# EAGLE board hv_lv_combo (EAGLE 7.2.0)
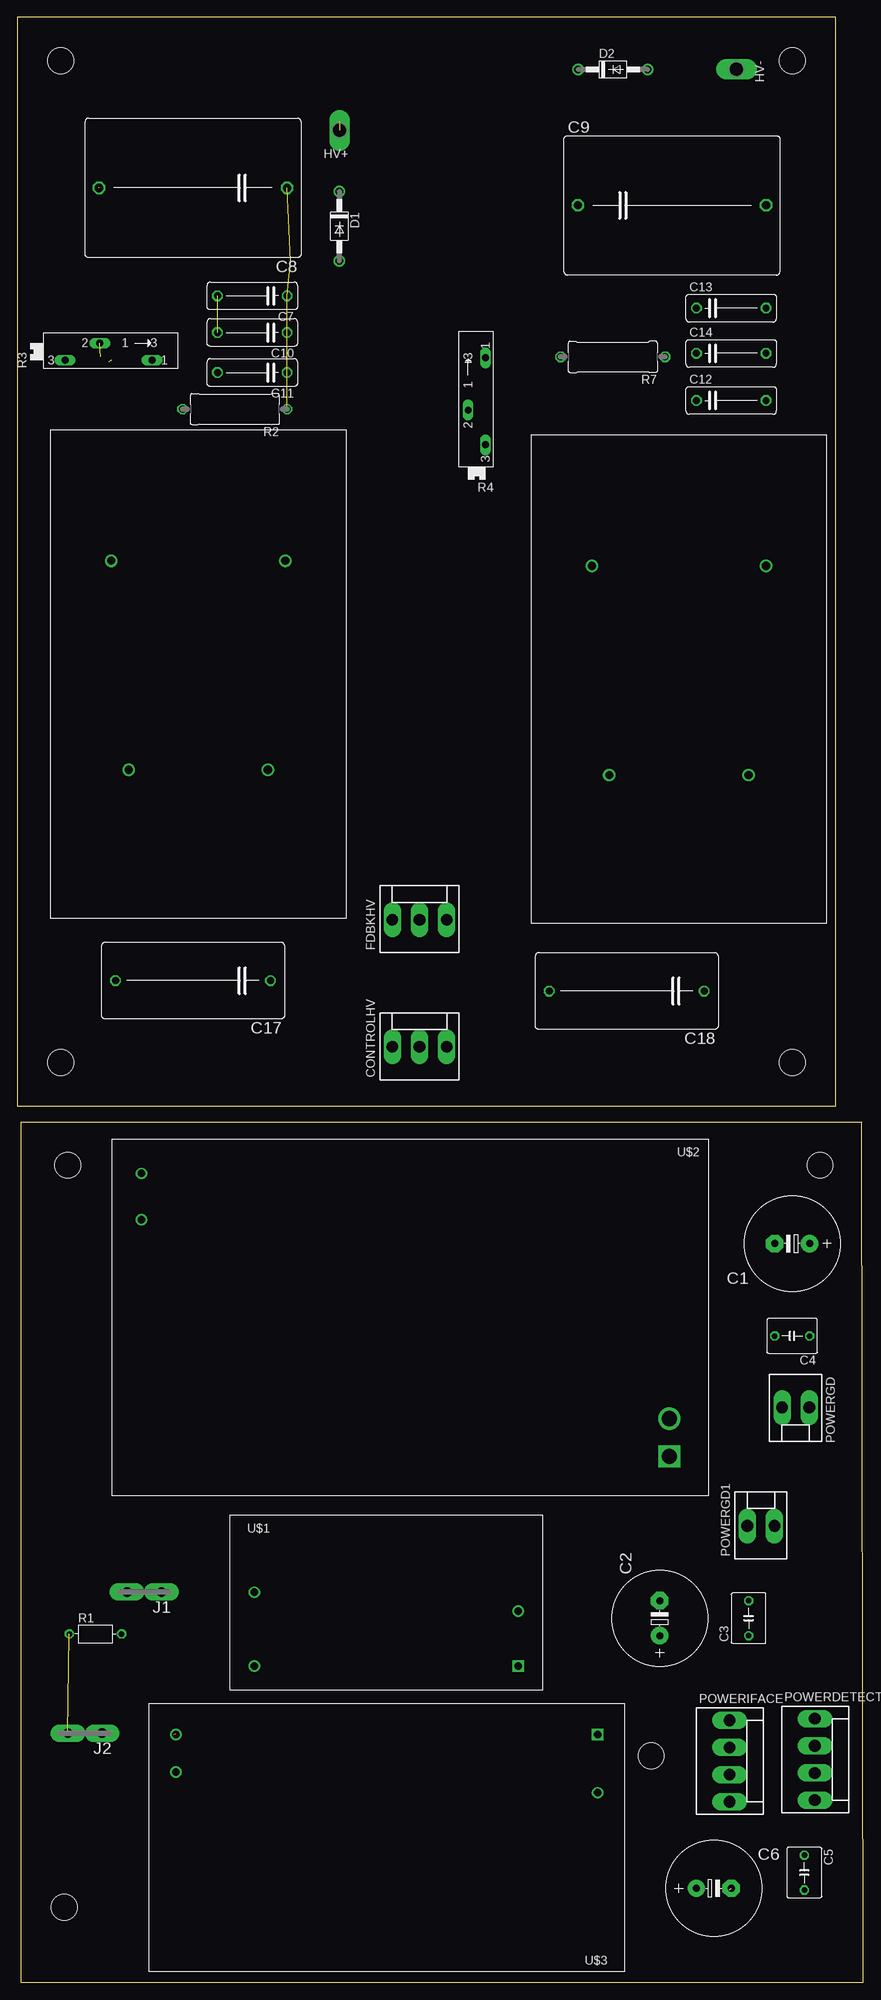
[diagram p0: board, top side]
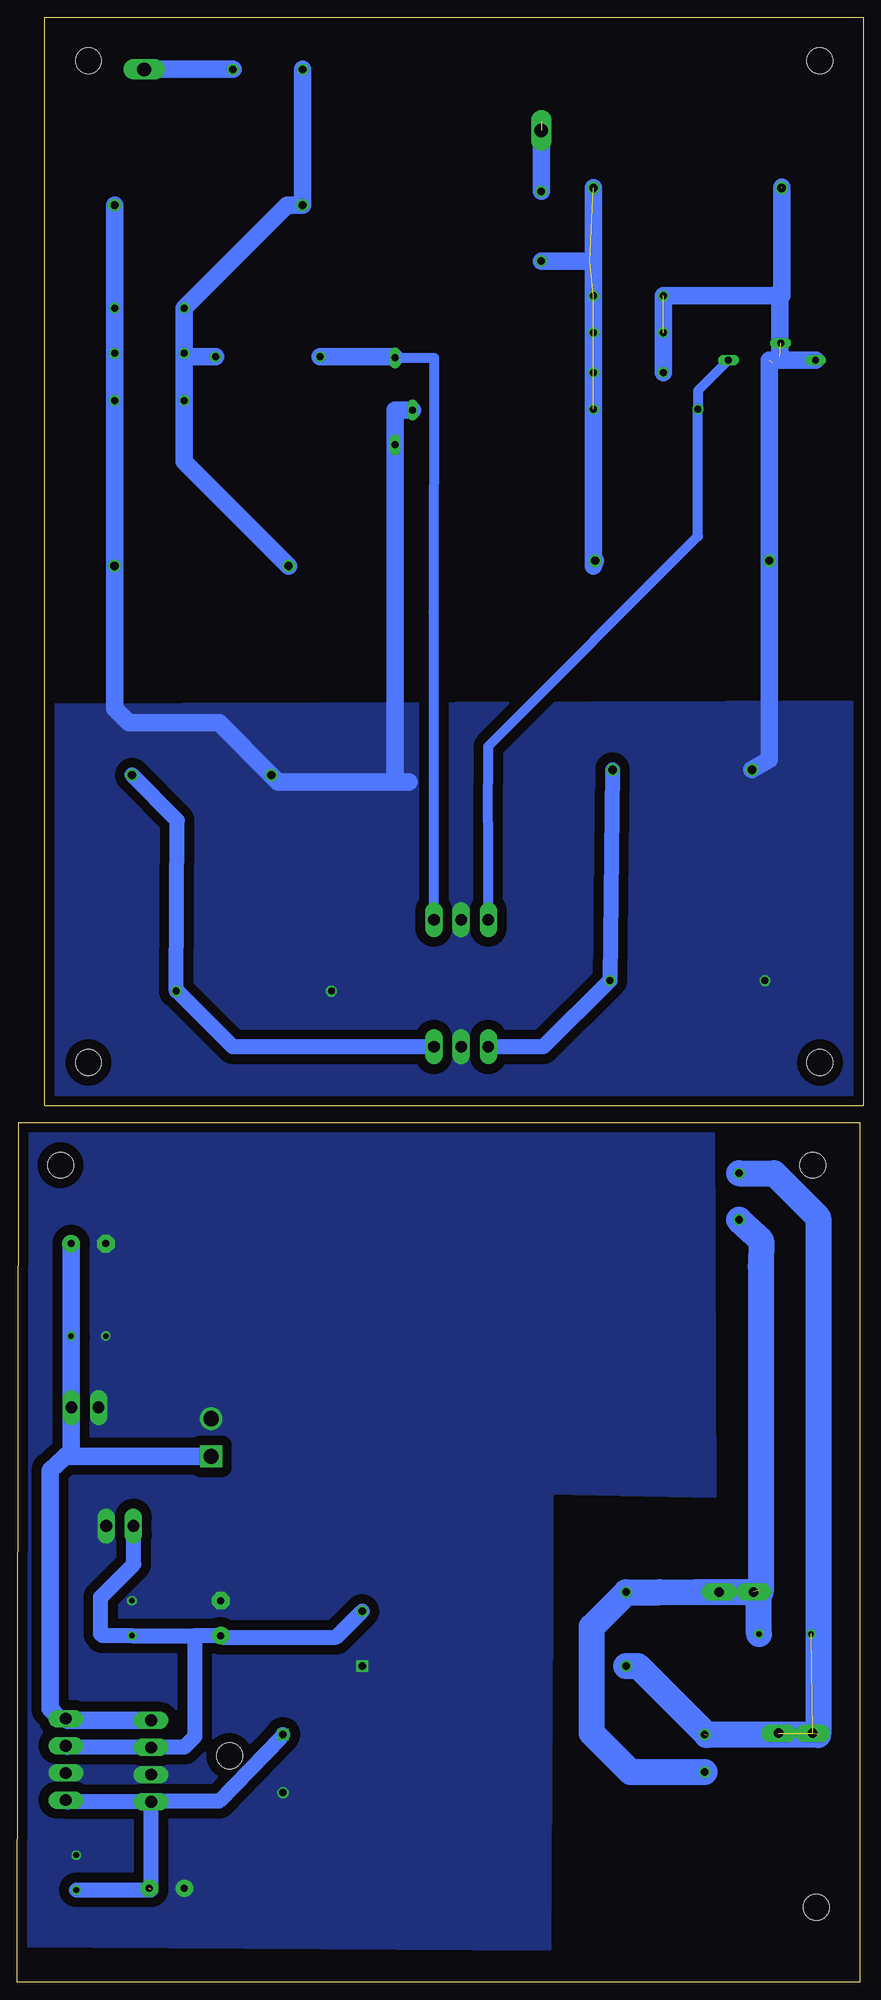
[diagram p1: board, bottom side, seen from below]

Size 123.42 x 286.51 mm. Coordinates in mm from the lower left corner, seen from the top.
Outline: 0.51,0 123.42,0 123.17,125.4 0.51,125.4 0.51,0
Outline: 119.38,127.76 119.38,286.51 0,286.51 0,127.76 119.38,127.76
Copper layers (1*16): Top 0.035mm / dielectric 1.5mm / Bottom 0.035mm
Design rules "default": minimum track width 10mil, minimum drill 24mil, track to track 8mil, track to pad 8mil, pad to pad 8mil, via to via 8mil, smd to smd 8mil, copper to edge 40mil, drill to drill 8mil, minimum pad ring 10mil, minimum via ring 8mil, stop-mask expansion 4mil, vias tented up to drill 0mil, thermal gap 10mil
Holes 3.8 mm at 117.09,119.13 92.46,33.02 7.37,119.13 6.86,10.92 113.03,280.16 6.35,280.16 113.03,134.11 6.35,134.11

## Footprints (pad centres in the part's own frame; a part is rotated, then mirrored left to right if it is on the bottom)
E5-13 = drill 1.016 pad 2.54: + -2.54,0 | drill 1.016 pad 2.54 octagon: - 2.54,0
C050-050X075 = drill 0.813 octagon: 1 -2.54,0; 2 2.54,0
C102-043X133 = drill 1.016 octagon: 1 -5.08,0; 2 5.08,0
C275-205X316 = drill 1.194 octagon: 1 -13.716,0; 2 13.716,0
C225-113X268 = drill 1.016 octagon: 1 -11.303,0; 2 11.303,0
KK-156-3 = drill 1.7 pad 2.184 long: 1 -3.96,0; 2 0,0; 3 3.96,0
DO41-10 = drill 1.118: A 5.08,0; C -5.08,0
P1-20Y = drill 2.007 pad 2.54 long: TP 0,0
F061.100 = drill 1.4 pad 2.54 long: A1 -2.5,0; A2 2.5,0
KK-156-4 = drill 1.7 pad 2.184 long: 1 -5.94,0; 2 -1.98,0; 3 1.98,0; 4 5.94,0
KK-156-2 = drill 1.7 pad 2.184 long: 1 -1.98,0; 2 1.98,0
R-7,5 = drill 0.813 octagon: 1 -3.81,0; 2 3.81,0
P0613/15 = drill 1.016 octagon: 1 -7.62,0; 2 7.62,0
SP19L = drill 1.016 long: A 5.715,-1.27; E -6.985,-1.27; S -1.905,1.27
IRM-05-05 = drill 1.1: +V 42.1,11.45; ACL 3.6,3.45; ACN 3.6,14.2 | drill 1.1 square: -V 42.1,3.45
IRM-60-12 = drill 2.2 square: P$1 5.7,46.25 | drill 2.2: P$2 5.7,40.75 | drill 1.1: P$3 82.7,5; P$4 82.7,11.75
IRM-30-15 = drill 1.1: +V 4,13; ACL 65.5,4.5; ACN 65.5,10 | drill 1.1 square: -V 4,4.5
EMCO-F = drill 1.2: P$1 0,0; P$2 0,20.32; P$3 30.48,-2.54; P$4 30.48,22.86

## Placement (x,y rotation side)
C1  [E5-13]  113.03,107.7 180 top
C2  [E5-13]  93.73,53.09 90 top
C3  [C050-050X075]  106.68,53.09 90 top
C4  [C050-050X075]  113.03,94.23 180 top
C5  [C050-050X075]  114.81,16 270 top
C6  [E5-13]  101.6,13.72 0 top
C7  .01u  [C102-043X133]  34.29,245.87 180 top
C8  1u  [C275-205X316]  25.65,261.62 180 top
C9  1u  [C275-205X316]  95.5,259.08 0 top
C10  1n  [C102-043X133]  34.29,240.54 180 top
C11  10p  [C102-043X133]  34.29,234.7 180 top
C12  .01u  [C102-043X133]  104.14,230.63 0 top
C13  1n  [C102-043X133]  104.14,244.09 0 top
C14  10p  [C102-043X133]  104.14,237.49 0 top
C17  .1u  [C225-113X268]  25.65,146.05 180 top
C18  .1u  [C225-113X268]  88.9,144.53 180 top
CONTROLHV  [KK-156-3]  58.67,136.4 0 top
D1  1N4004  [DO41-10]  46.99,256.03 270 top
D2  1N4004  [DO41-10]  86.87,278.89 0 top
FDBKHV  [KK-156-3]  58.67,154.94 0 top
HV+  TPPAD1-20Y  [P1-20Y]  46.99,270 180 top
HV-  TPPAD1-20Y  [P1-20Y]  104.9,278.89 270 top
J1  PIN2F061.100  [F061.100]  18.54,56.9 180 top
J2  PIN2F061.100  [F061.100]  9.91,36.32 180 top
POWERDETECT  [KK-156-4]  116.33,32.51 270 top
POWERGD  [KK-156-2]  113.54,83.82 180 top
POWERGD1  [KK-156-2]  108.46,66.55 0 top
POWERIFACE  [KK-156-4]  103.89,32.26 270 top
R1  VARISTOR-7,5  [R-7,5]  11.43,50.8 0 top
R2  2M  [P0613/15]  31.75,229.36 180 top
R3  [SP19L]  13.97,237.74 0 top
R4  [SP19L]  67.06,231.14 90 top
R7  2M  [P0613/15]  86.87,236.98 180 top
U$1  IRM-05-05  [IRM-05-05]  30.99,42.67 0 top
U$2  IRM-60-12  [IRM-60-12]  100.84,122.94 180 top
U$3  IRM-30-15  [IRM-30-15]  88.65,40.64 180 top
U$4  EMCO-F104PIN  [EMCO-F]  36.58,176.78 90 top
U$5  EMCO-F104PIN  [EMCO-F]  106.68,176.02 90 top

## Library data of the parts
C1-C14 C17 C18 = rcl
CONTROLHV FDBKHV POWERDETECT POWERGD POWERGD1 POWERIFACE = con-molex; OC_FARNELL: unknown; OC_NEWARK: unknown
D1 D2 = diode
HV+ HV- = testpad
J1 J2 = con-faston; OC_FARNELL: unknown; OC_NEWARK: unknown
R1 = varistor
R2 R7 = resistor
R3 R4 = pot
U$1-U$3 = meanwell
U$4 U$5 = dc-dc-converter

## Nets
+15V: C1.+ C4.1 POWERDETECT.1 POWERGD.1 POWERIFACE.1 U$2.P$1
-15V: C5.2 C6.- POWERDETECT.4 POWERIFACE.4 U$3.-V
GND: C1.- C2.- C3.2 C4.2 C5.1 C6.+ POWERDETECT.3 POWERGD1.2 POWERGD.2 POWERIFACE.3 U$1.-V U$2.P$2 U$3.+V
GND1: C7.2 C8.2 C9.2 C10.2 C11.2 C12.2 C13.2 C14.2 C17.2 C18.2 CONTROLHV.2 FDBKHV.2 R3.E R3.S R4.E R4.S U$4.P$2 U$4.P$4 U$5.P$2 U$5.P$3
N$1: J1.A1 J1.A2 R1.2 U$1.ACN U$2.P$4 U$3.ACN
N$2: J2.A1 J2.A2 R1.1 U$1.ACL U$2.P$3 U$3.ACL
N$4: C7.1 C8.1 C10.1 C11.1 D1.A R2.1 U$4.P$3
N$5: C9.1 C12.1 C13.1 C14.1 D2.C R7.1 U$5.P$4
N$6: FDBKHV.1 R2.2 R3.A
N$7: D1.C HV+.TP
N$8: FDBKHV.3 R4.A R7.2
N$9: D2.A HV-.TP
N$13: C17.1 CONTROLHV.1 U$4.P$1
N$15: C18.1 CONTROLHV.3 U$5.P$1
VCC: C2.+ C3.1 POWERDETECT.2 POWERGD1.1 POWERIFACE.2 U$1.+V

## Tracks (layer width: path | path; a pad name or v marks a point on that pad's centre or on a via)
+15V
  Bottom 2.54: U$2.P$1 115.55,76.69 115.57,77.47 | 115.57,77.47 115.57,83.51 POWERGD.1 115.52,94.03 C4.1 C1.+ | POWERIFACE.1 116.08,38.2 POWERDETECT.1 117.19,38.45 118.62,39.88 118.62,74.68 115.57,77.47
-15V  (1 unrouted)
  Bottom 2.184: C5.2 103.89,13.46 POWERIFACE.4 104.65,26.32 | 104.65,26.32 116.08,26.32 POWERDETECT.4 | U$3.-V 85.02,35.63 93.98,26.42 104.55,26.42 104.65,26.32
GND
  pour Bottom (isolate 1.422, no thermals): 44.96,124.97 123.19,125.22 123.44,5.33 45.72,4.83
GND1  (4 unrouted)
  Bottom 2.54: U$4.P$2 13.72,178.31 U$4.P$4 13.72,236.47 | 12.45,245.87 C7.2 C11.2 | 11.94,261.75 11.94,245.87 12.19,245.87 | 13.34,236.22 12.43,236.52 | 12.43,236.52 R3.E | 12.19,245.87 12.45,245.87 | 12.45,245.87 12.7,246.13 12.45,246.13 12.19,245.87 | 12.19,245.87 12.19,237.05 12.43,236.52 | C9.2 C13.2 C14.2 C12.2 U$5.P$3 109.22,185.67 107.19,183.64 93.98,183.64 U$5.P$2 85.34,175.01 68.33,175.01 | R4.S 68.33,229.24 R4.E 68.33,175.01 | 66.29,175.01 68.33,175.01
  pour Bottom (isolate 1.422, no thermals): 0,127.76 0.25,186.69 119.13,186.18 119.38,128.02
N$1  (1 unrouted)
  Bottom 3.81: U$2.P$4 14.92,108.14 14.99,104.39 14.99,57.4 | 14.99,57.4 14.99,56.9 | 14.99,56.9 19.07,56.87 | 14.99,56.9 J1.A1 24.38,56.9 29.69,56.87 U$1.ACN 39.62,51.84 39.62,36.32 33.94,30.64 U$3.ACN | R1.2 15.24,57.15 14.99,57.4
N$2  (4 unrouted)
  Bottom 3.81: U$1.ACL 32.91,46.12 22.86,36.07 6.6,36.07 6.6,111.51 13.03,117.94 U$2.P$3
N$3
  pour Bottom (isolate 1.422, no thermals): 21.84,124.97 45.72,125.22 45.97,71.37 21.59,70.87
N$4  (5 unrouted)
  Bottom 2.54: C8.1 39.37,206.5 U$4.P$3 | D1.A 39.88,250.95
N$5
  Bottom 2.54: D2.C C9.1 84.07,259.08 C13.1 C14.1 99.06,236.98 | 99.06,236.98 C12.1 99.06,221.74 U$5.P$4 | R7.1 99.06,236.98
N$6
  Bottom 1.422: R3.A 24.13,232.03 R2.2 24.13,210.82 54.71,180.24 54.77,169.26 54.77,154.99 FDBKHV.1
N$7  (1 unrouted)
  Bottom 2.54: D1.C 46.99,271.27
N$8
  Bottom 1.422: R4.A 62.61,236.86 62.68,199.9 | 62.68,199.9 62.69,199.59 | FDBKHV.3 62.63,199.59 62.68,199.9
  Bottom 2.54: R7.2 68.45,236.98 R4.A
N$9
  Bottom 2.54: HV-.TP D2.A
N$13
  Bottom 2.184: U$4.P$1 C17.1 46.74,136.4 CONTROLHV.1
N$15
  Bottom 2.184: CONTROLHV.3 91.95,136.4 100.08,144.53 C18.1 100.08,169.42 U$5.P$1
VCC
  Bottom 2.184: 97.54,50.55 C2.+ 93.49,50.31 76.9,50.31 U$1.+V | POWERGD1.1 106.43,66.5 106.43,60.96 111.25,56.13 111.25,50.8 111,50.55 C3.1 97.54,50.55 | 97.54,50.55 97.54,35.81 99.06,34.29 103.83,34.29 POWERIFACE.2 116.08,34.24 POWERDETECT.2